# Altium PCB PCB_Testplatine - GND mit Tracks.PcbDoc (part 2 of 4)
Units mm, origin at the board's own origin, x right, y up, seen from the top; angles counter-clockwise.
Board outline 124.77 x 137.35 mm, 2 copper layers (Top Layer, Bottom Layer); 214 components, 181 nets, 1100 pads, 464 vias.
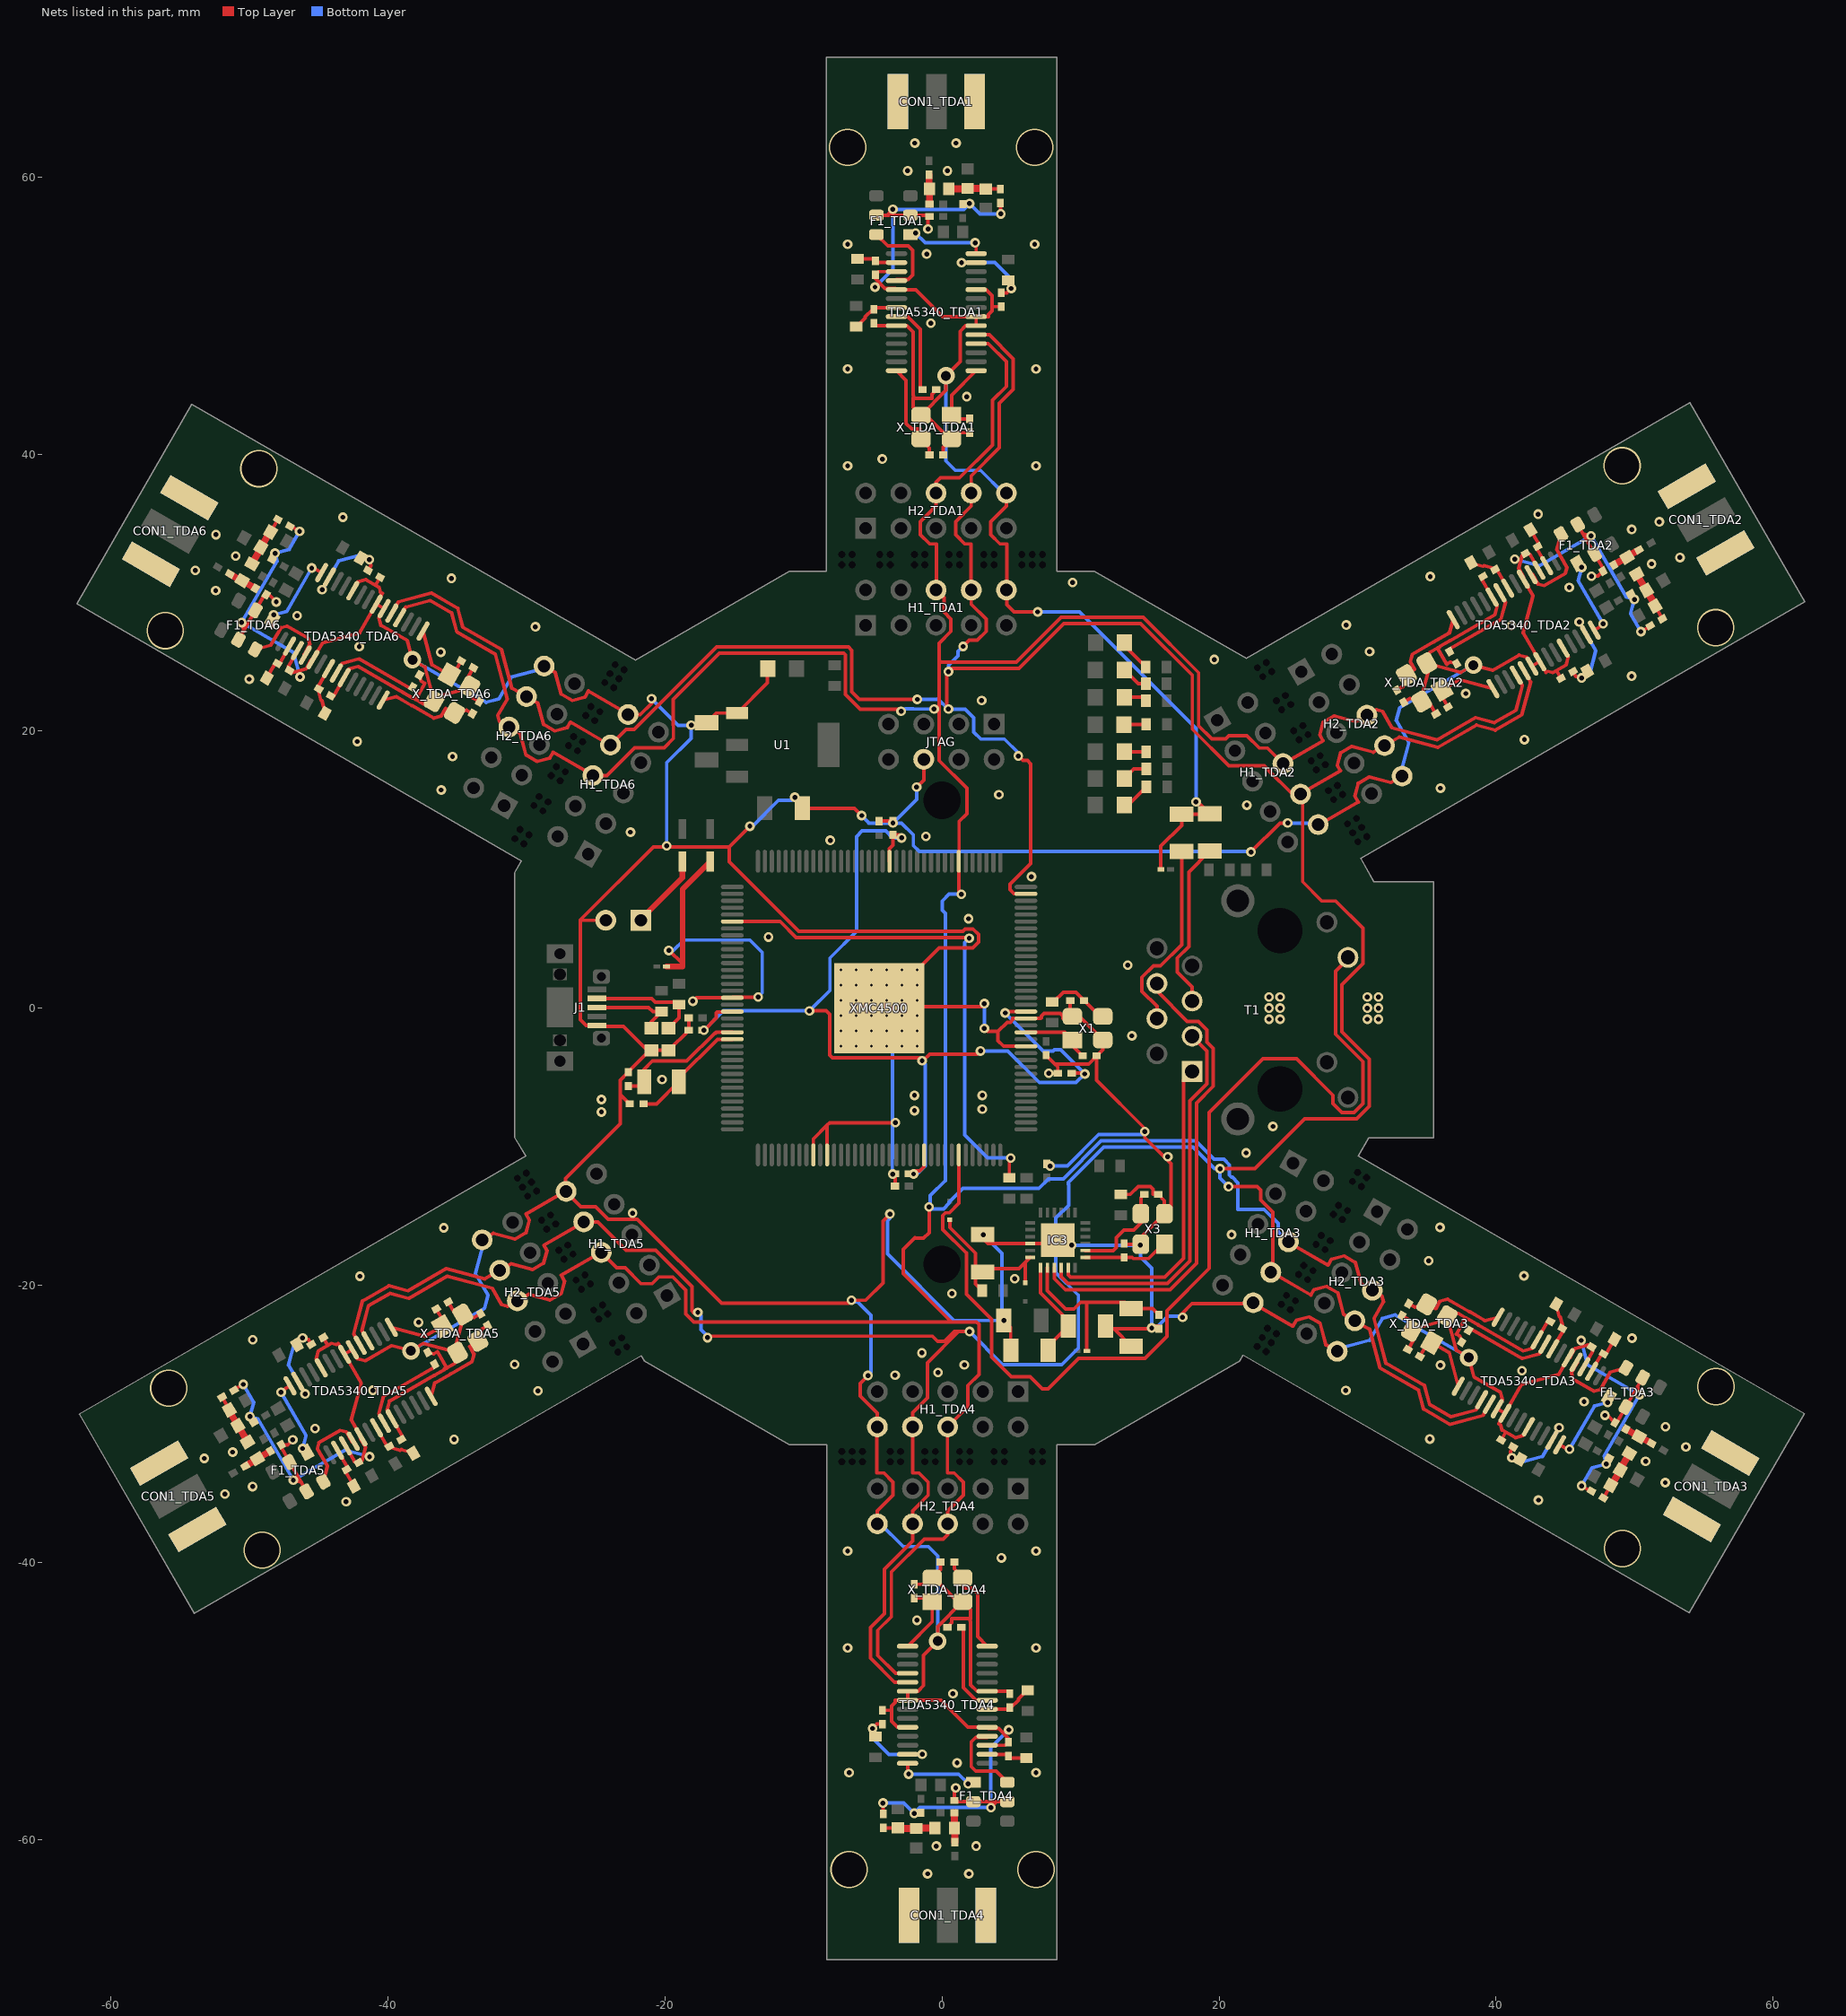
[diagram p2: the nets of this part, all layers, seen from the top]

## Via types
v1: diameter 0.7, hole 0.35, Top Layer to Bottom Layer, 410 vias
v2: diameter 0.5, hole 0.2, Top Layer to Bottom Layer, 36 vias
v3: diameter 2.7, hole 2.5, Top Layer to Bottom Layer, 12 vias
v4: diameter 1.27, hole 0.711, Top Layer to Bottom Layer, 6 vias

## Nets (pads, with @x,y where several pads share a name; then routed paths per layer and width w, separated by ;. In a path a pad name is that pad's centre, name@x,y a point inside that pad or via, vN(x,y) a via of type N, cw(c..) or ccw(c..) an arc to the next point about the centre after c; other vN are vias at no path point) (continued)
GND: C1.1 C2.1 C3.1 C4.1 C5.1 C6.1 C7.1 C8.1 C9.1 C10.1 C11.1 C12.1 C21_TDA1.2 C21_TDA2.2 C21_TDA3.2 C21_TDA4.2 C21_TDA5.2 C21_TDA6.2 C22_TDA1.2 C22_TDA2.2 C22_TDA3.2 C22_TDA4.2 C22_TDA5.2 C22_TDA6.2 C23_TDA1.2 C23_TDA2.2 C23_TDA3.2 C23_TDA4.2 C23_TDA5.2 C23_TDA6.2 C24_TDA1.2 C24_TDA2.2 C24_TDA3.2 C24_TDA4.2 C24_TDA5.2 C24_TDA6.2 C25_TDA1.2 C25_TDA2.2 C25_TDA3.2 C25_TDA4.2 C25_TDA5.2 C25_TDA6.2 C26_TDA1.1 C26_TDA2.1 C26_TDA3.1 C26_TDA4.1 C26_TDA5.1 C26_TDA6.1 C27_TDA1.1 C27_TDA2.1 C27_TDA3.1 C27_TDA4.1 C27_TDA5.1 C27_TDA6.1 C28_TDA1.2 C28_TDA2.2 C28_TDA3.2 C28_TDA4.2 C28_TDA5.2 C28_TDA6.2 C30_TDA1.1 C30_TDA2.1 C30_TDA3.1 C30_TDA4.1 C30_TDA5.1 C30_TDA6.1 C100.1 C101.1 C200.1 C201.1 C202.1 C203.1 C204.1 C205.1 C206.1 C207.1 C208.1 C209.1 C210.1 CON1_TDA1.0 CON1_TDA2.0 CON1_TDA3.0 CON1_TDA4.0 CON1_TDA5.0 CON1_TDA6.0 D2.1 D3.1 F1_TDA1.2 F1_TDA1.5 F1_TDA2.2 F1_TDA2.5 F1_TDA3.2 F1_TDA3.5 F1_TDA4.2 F1_TDA4.5 F1_TDA5.2 F1_TDA5.5 F1_TDA6.2 F1_TDA6.5 H1_TDA1.10 H1_TDA2.10 H1_TDA3.10 H1_TDA4.10 H1_TDA5.10 H1_TDA6.10 H2_TDA1.10 H2_TDA2.10 H2_TDA3.10 H2_TDA4.10 H2_TDA5.10 H2_TDA6.10 H3.2 IC3.22 IC3.EXP J1.5 JTAG.6 L201.1 Power.2 R205.1 TDA5340_TDA1.3 TDA5340_TDA1.5 TDA5340_TDA1.9 TDA5340_TDA1.20 TDA5340_TDA1.21 TDA5340_TDA1.24 TDA5340_TDA2.3 TDA5340_TDA2.5 TDA5340_TDA2.9 TDA5340_TDA2.20 TDA5340_TDA2.21 TDA5340_TDA2.24 TDA5340_TDA3.3 TDA5340_TDA3.5 TDA5340_TDA3.9 TDA5340_TDA3.20 TDA5340_TDA3.21 TDA5340_TDA3.24 TDA5340_TDA4.3 TDA5340_TDA4.5 TDA5340_TDA4.9 TDA5340_TDA4.20 TDA5340_TDA4.21 TDA5340_TDA4.24 TDA5340_TDA5.3 TDA5340_TDA5.5 TDA5340_TDA5.9 TDA5340_TDA5.20 TDA5340_TDA5.21 TDA5340_TDA5.24 TDA5340_TDA6.3 TDA5340_TDA6.5 TDA5340_TDA6.9 TDA5340_TDA6.20 TDA5340_TDA6.21 TDA5340_TDA6.24 U1.1 X1.2 X1.4 X3.2 X3.4 X_TDA_TDA1.2 X_TDA_TDA1.4 X_TDA_TDA2.2 X_TDA_TDA2.4 X_TDA_TDA3.2 X_TDA_TDA3.4 X_TDA_TDA4.2 X_TDA_TDA4.4 X_TDA_TDA5.2 X_TDA_TDA5.4 X_TDA_TDA6.2 X_TDA_TDA6.4 XMC4500.45 XMC4500.47 XMC4500.85 XMC4500.89 XMC4500.145 | length 841.6
  Top Layer w0.254: C30_TDA5.1@-51.115,-27.541 v1(-50.457,-27.161) ; F1_TDA6.5@-50.807,26.592 -50.424,27.255 ; v1(-50.578,27.829) -50.424,27.255 ; C28_TDA6.2@-48.944,29.818 F1_TDA6.2@-49.582,28.714 -50.424,27.255 ; C28_TDA6.2@-48.808,29.855 -48.615,29.855 v1(-48.078,29.318) ; C28_TDA5.2@-47.754,-31.663 F1_TDA5.2@-47.117,-32.767 -46.274,-34.226 ; C28_TDA5.2@-47.718,-31.526 -47.252,-31.526 v1(-46.888,-31.163) ; C30_TDA6.1@-47.055,34.79 v1(-46.397,34.41) ; v1(-46.848,-34.073) -46.274,-34.226 ; TDA5340_TDA6.3@-46.553,25.811 -47.203,24.685 C22_TDA6.2@-47.12,24.377 -46.872,24.234 -45.923,24.489 -45.555,25.126 TDA5340_TDA6.5@-45.427,25.161 -44.727,26.373 -42.063,27.087 TDA5340_TDA6.21@-40.863,29.165 ; F1_TDA5.5@-45.892,-34.889 -46.274,-34.226 ; TDA5340_TDA5.24@-45.205,-25.328 -45.052,-24.755 -44.09,-24.2 -43.74,-24.293 -43.598,-24.212 TDA5340_TDA5.21@-43.148,-24.991 ; C23_TDA5.2@-44.684,-23.782 -44.364,-24.335 ; C21_TDA6.2@-44.139,22.541 -44.03,22.478 -43.963,22.495 TDA5340_TDA6.9@-43.175,23.861 -42.807,24.498 -42.171,24.669 -38.929,22.797 -38.926,22.786 -38.22,22.378 -38.167,22.392 -38.007,22.3 -37.345,23.446 -37.616,23.602 C24_TDA6.2@-37.732,24.038 ; TDA5340_TDA5.3@-43.088,-31.596 -42.438,-32.721 C22_TDA5.2@-42.13,-32.804 -41.882,-32.661 -41.628,-31.712 -41.996,-31.074 -41.962,-30.946 -42.662,-29.733 -41.948,-27.069 TDA5340_TDA5.21@-43.148,-24.991 ; TDA5340_TDA5.20@-42.585,-24.666 TDA5340_TDA5.21@-43.148,-24.991 ; TDA5340_TDA5.20@-42.21,-25.315 -41.656,-25.464 -39.75,-24.364 v4(-38.358,-24.737) -37.449,-24.212 X_TDA_TDA5.2@-34.99,-24.871 ; TDA5340_TDA6.24@-42.184,30.778 -41.61,30.932 -40.649,30.376 -40.555,30.026 -40.413,29.945 TDA5340_TDA6.21@-40.863,29.165 ; -40.903,30.546 C23_TDA6.2@-40.584,31.1 ; TDA5340_TDA6.20@-40.675,28.191 -40.527,27.636 -38.621,26.536 v4(-38.248,25.144) -37.339,24.619 X_TDA_TDA6.2@-36.68,22.16 ; TDA5340_TDA6.20@-40.3,28.84 TDA5340_TDA6.21@-40.863,29.165 ; C21_TDA5.2@-39.049,-31.14 -38.967,-31.093 -38.938,-30.983 TDA5340_TDA5.9@-39.71,-29.646 -40.078,-29.008 -39.908,-28.372 -36.666,-26.5 -36.655,-26.503 -35.949,-26.095 -35.935,-26.042 -35.775,-25.95 -36.436,-24.804 -36.707,-24.96 C24_TDA5.2@-37.142,-24.843 ; -38.049,22.289 -37.463,21.951 X_TDA_TDA6.2@-36.68,22.16 ; -35.786,-25.992 -35.2,-25.654 X_TDA_TDA5.2@-34.99,-24.871 ; C25_TDA5.2@-35.658,-21.215 -35.233,-21.951 X_TDA_TDA5.4@-34.618,-22.116 ; C25_TDA6.2@-33.848,24.566 -34.273,23.83 X_TDA_TDA6.4@-34.108,23.216 ; C26_TDA6.1@-33.412,22.121 -33.888,22.396 X_TDA_TDA6.4@-34.108,23.216 ; C26_TDA5.1@-33.322,-22.06 -33.798,-22.335 X_TDA_TDA5.4@-34.618,-22.116 ; H2_TDA5.10@-33.212,-16.731 -32.397,-16.261 -30.852,-16.675 -30.041,-16.206 -29.798,-15.301 -30.053,-14.861 H1_TDA5.10@-27.204,-13.217 ; H2_TDA6.10@-28.742,24.69 -27.927,24.22 -27.513,22.675 -26.702,22.206 -25.797,22.449 -25.543,22.889 H1_TDA6.10@-22.694,21.245 ; -26.08,6.34 H3.2@-24.29,6.34 ; H1_TDA6.10@-22.68,21.19 -21.799,21.19 -20.98,22.009 v1(-20.98,22.33) ; C12.1@-22.56,-6.91 -23.237,-6.233 ; C5.1@-18.3,-0.7 C4.1@-18.3,-1.6 D2.1@-19.75,-3.05 D3.1@-21,-3.05 D3.1@-21.112,-3.05 ; v1(-18.12,20.42) -17.18,20.42 C101.1@-17,20.6 -16.3,21.3 U1.1@-14.8,21.3 -12.61,23.49 Power.2@-12.61,24.51 ; v1(-13.88,13.13) -15.383,11.627 ; C100.1@-10.1,14.43 -6.34,14.43 v1(-5.81,13.9) ; XMC4500.45@-9.3,-10.6 -9.3,-9.45 -8.3,-8.45 ; XMC4500.47@-8.3,-10.6 -8.3,-8.45 ; v1(-5.36,-26.52) -5.36,-26.56 -5.91,-27.11 -5.91,-28 -4.68,-29.23 H1_TDA4.10@-4.68,-30.23 ; C21_TDA1.2@-4.92,49.44 -4.92,49.33 -4.855,49.265 TDA5340_TDA1.9@-3.295,49.265 -2.559,49.265 -2.093,48.799 -2.093,45.056 -2.101,45.048 -2.101,44.232 -2.062,44.193 -2.062,44.009 -0.739,44.009 -0.739,44.321 C24_TDA1.2@-0.42,44.64 ; F1_TDA1.5@-4.745,57.24 -3.98,57.24 ; H1_TDA4.10@-4.72,-30.27 -4.72,-33.559 -4.212,-33.559 -3.549,-34.222 -3.549,-35.158 -4.68,-36.289 H2_TDA4.10@-4.68,-37.23 ; C8.1@-4.55,13.5 C1.1@-3.55,13.5 v1(-3.55,13.36) ; C23_TDA4.2@-4.31,-50.69 -3.671,-50.69 ; C30_TDA4.1@-4.27,-58.14 v1(-4.27,-57.38) ; v1(-3.773,-14.86) -4.274,-15.361 -4.274,-19.84 -5.524,-21.09 v1(-6.542,-21.09) -6.765,-21.313 -15.93,-21.313 -22.005,-15.238 -24.126,-15.238 -25.034,-14.33 -26.091,-14.33 H1_TDA5.10@-27.204,-13.217 ; v1(-3.57,-11.98) -3.57,-11.95 C3.1@-3.4,-11.95 ; v1(-3.56,57.66) -3.98,57.24 ; C6.1@-3.4,-12.85 C3.1@-3.4,-11.98 ; v1(-3.37,-8.27) -8.12,-8.27 -8.3,-8.45 ; TDA5340_TDA1.3@-3.295,53.165 -4.595,53.165 C22_TDA1.2@-4.82,52.94 -4.82,52.654 -4.125,51.959 -3.389,51.959 TDA5340_TDA1.5@-3.295,51.865 -1.895,51.865 0.055,49.915 TDA5340_TDA1.21@2.455,49.915 ; TDA5340_TDA4.24@-3.231,-51.915 -3.651,-51.495 -3.651,-50.385 -3.395,-50.129 -3.395,-49.965 TDA5340_TDA4.21@-2.495,-49.965 ; TDA5340_TDA4.20@-2.495,-49.315 TDA5340_TDA4.21@-2.495,-49.965 ; -2.093,44.04 -2.093,43.363 X_TDA_TDA1.2@-1.52,42.79 ; C25_TDA4.2@-2.02,-41.59 -1.17,-41.59 X_TDA_TDA4.4@-0.72,-41.14 ; v1(-1.84,15.96) -1.33,16.47 JTAG.6@-1.33,17.96 ; TDA5340_TDA4.20@-1.745,-49.315 -1.339,-48.909 -1.339,-46.709 v4(-0.32,-45.69) -0.32,-44.64 X_TDA_TDA4.2@1.48,-42.84 ; v1(-1.02,56.24) -1.02,57.04 C28_TDA1.2@-0.92,57.14 ; C28_TDA1.2@-1.02,57.24 F1_TDA1.2@-2.295,57.24 -3.98,57.24 ; C26_TDA4.1@-0.12,-39.99 -0.12,-40.54 X_TDA_TDA4.4@-0.72,-41.14 ; C26_TDA1.1@0.08,39.94 0.08,40.49 X_TDA_TDA1.4@0.68,41.09 ; C24_TDA4.2@0.38,-44.69 0.699,-44.371 0.699,-44.059 2.022,-44.059 2.022,-44.243 2.061,-44.282 2.061,-45.098 2.053,-45.106 2.053,-48.849 2.519,-49.315 TDA5340_TDA4.9@3.255,-49.315 4.655,-49.315 4.88,-49.54 C21_TDA4.2@4.88,-49.49 ; C28_TDA4.2@0.88,-57.19 0.88,-56.39 v1(0.98,-56.29) ; C28_TDA4.2@0.98,-57.29 3.94,-57.29 ; TDA5340_TDA1.20@1.705,49.265 1.299,48.859 1.299,46.659 v4(0.28,45.64) 0.28,44.59 X_TDA_TDA1.2@-1.52,42.79 ; C25_TDA1.2@1.98,41.54 1.13,41.54 X_TDA_TDA1.4@0.68,41.09 ; 2.053,-44.09 2.053,-43.413 X_TDA_TDA4.2@1.48,-42.84 ; TDA5340_TDA1.20@2.455,49.265 TDA5340_TDA1.21@2.455,49.915 ; C210.1@2.93,-16.63 3.3,-17 8.1,-17 IC3.EXP@8.35,-16.75 ; v1(3.05,-1.46) 3.279,-1.689 4.031,-1.689 ; v1(3.05,0.327) 3.05,0.194 2.96,0.104 -4.446,0.104 v2(-4,0.55) v2(-1.8,2.75) -0.21,4.34 2.207,4.34 2.627,4.76 2.627,5.32 2.23,5.717 1.67,5.717 1.497,5.544 -10.349,5.544 -15.383,10.578 -15.383,11.627 ; TDA5340_TDA1.24@3.191,51.865 3.611,51.445 3.611,50.335 3.355,50.079 3.355,49.915 TDA5340_TDA1.21@2.455,49.915 ; TDA5340_TDA4.3@3.255,-53.215 4.555,-53.215 C22_TDA4.2@4.78,-52.99 4.78,-52.704 4.085,-52.009 3.349,-52.009 TDA5340_TDA4.5@3.255,-51.915 1.855,-51.915 -0.095,-49.965 TDA5340_TDA4.21@-2.495,-49.965 ; v1(3.52,-57.71) 3.94,-57.29 ; 3.631,50.64 C23_TDA1.2@4.27,50.64 ; v1(4.23,57.33) C30_TDA1.1@4.23,58.09 ; v1(4.45,-22.55) 4.95,-23.05 C202.1@4.95,-24.7 ; H2_TDA1.10@4.64,37.18 4.64,36.239 3.509,35.108 3.509,34.172 4.172,33.509 4.68,33.509 4.68,29.123 5.203,28.6 v1(6.9,28.6) ; F1_TDA4.5@4.705,-57.29 3.94,-57.29 ; XMC4500.85@6.05,-2.75 6.027,-2.727 6.027,-2.75 4.428,-2.75 4.031,-2.353 4.031,-1.689 ; C7.1@7.5,-3.4 8.127,-4.027 ; C200.1@7.55,-11.25 7.927,-11.25 7.927,-11.301 7.828,-11.4 v1(7.8,-11.4) ; C2.1@8.35,-4.7 8.35,-4.25 8.127,-4.027 ; X1.4@9.25,-0.75 8.727,-0.75 8.727,-0.565 8.535,-0.373 7.365,-0.373 7.173,-0.565 7.173,-0.694 7.117,-0.75 XMC4500.89@6.05,-0.75 5.107,-0.75 5.107,-0.843 4.923,-1.027 4.693,-1.027 4.031,-1.689 ; C10.1@9.25,0.55 9.25,-0.45 9.75,-0.45 X1.2@11.6,-2.3 11.6,-3 C9.1@11.15,-3.45 C9.1@11.15,-3.462 ; C207.1@11.8,-22.95 12,-23.15 12.4,-23.15 ; R205.1@12.9,-13.45 13.588,-13.45 14.165,-12.873 15.035,-12.873 15.227,-13.065 15.227,-13.45 C206.1@15.6,-13.45 16.05,-13.9 X3.2@16.05,-14.85 ; C205.1@13.2,-17.05 X3.4@14.32,-17.05 ; C208.1@13.65,-24.4 12.4,-23.15 ; X3.4@14.35,-17.05 14.35,-16.55 X3.2@16.05,-14.85 ; v1(15.13,-23.09) 15.27,-22.95 15.65,-22.95 C201.1@15.65,-23.15 12.4,-23.15 ; L201.1@15.79,10.01 15.79,11.69 17.29,13.19 C203.1@17.29,14.01 C204.1@19.21,14.01 ; v1(17.36,-22.32) 17.29,-22.25 17.29,-22.067 18.032,-21.325 22.474,-21.325 25.323,-22.969 25.577,-22.529 26.482,-22.286 27.293,-22.755 27.707,-24.3 H2_TDA3.10@28.522,-24.77 ; v1(18.33,14.89) 18.46,14.89 C204.1@19.32,14.03 ; v1(22.294,11.27) 24.384,13.36 v1(24.95,13.36) ; H1_TDA2.10@27.205,13.235 30.053,14.88 29.799,15.32 30.041,16.225 30.853,16.694 32.398,16.28 H2_TDA2.10@33.212,16.75 ; C26_TDA3.1@33.192,-22.201 33.668,-22.476 X_TDA_TDA3.4@33.888,-23.296 ; C26_TDA2.1@33.322,22.079 33.799,22.354 X_TDA_TDA2.4@34.618,22.134 ; C25_TDA3.2@33.628,-24.646 34.053,-23.91 X_TDA_TDA3.4@33.888,-23.296 ; C25_TDA2.2@35.658,21.234 35.233,21.97 X_TDA_TDA2.4@34.618,22.134 ; 35.787,26.011 35.2,25.672 X_TDA_TDA2.2@34.991,24.89 ; C24_TDA2.2@37.143,24.862 36.707,24.979 36.437,24.823 35.775,25.969 35.935,26.061 35.949,26.114 36.655,26.522 36.666,26.519 39.908,28.391 40.079,29.027 TDA5340_TDA2.9@39.711,29.664 38.895,31.077 38.893,31.069 C21_TDA2.2@39.05,31.159 ; C24_TDA3.2@37.512,-24.118 37.396,-23.682 37.125,-23.526 37.787,-22.38 37.947,-22.472 38,-22.458 38.706,-22.866 38.709,-22.877 41.951,-24.749 42.587,-24.578 TDA5340_TDA3.9@42.955,-23.941 43.718,-22.62 43.854,-22.583 C21_TDA3.2@43.919,-22.621 ; 37.829,-22.369 37.243,-22.031 X_TDA_TDA3.2@36.46,-22.24 ; TDA5340_TDA3.20@40.08,-28.92 TDA5340_TDA3.21@40.643,-29.245 ; C23_TDA3.2@40.364,-31.18 40.683,-30.626 ; TDA5340_TDA3.20@40.455,-28.271 40.307,-27.716 38.401,-26.616 v4(38.028,-25.224) 37.119,-24.699 X_TDA_TDA3.2@36.46,-22.24 ; TDA5340_TDA3.24@41.964,-30.858 41.39,-31.012 40.429,-30.456 40.335,-30.106 40.193,-30.025 TDA5340_TDA3.21@40.643,-29.245 ; TDA5340_TDA2.20@42.211,25.334 41.656,25.483 39.751,24.383 v4(38.359,24.756) 37.449,24.231 X_TDA_TDA2.2@34.991,24.89 ; TDA5340_TDA2.20@42.586,24.685 TDA5340_TDA2.21@43.149,25.01 ; TDA5340_TDA2.3@43.088,31.614 42.438,32.74 C22_TDA2.2@42.131,32.823 41.883,32.679 41.629,31.73 41.997,31.093 TDA5340_TDA2.5@41.962,30.964 42.662,29.752 41.949,27.088 TDA5340_TDA2.21@43.149,25.01 ; 44.364,24.354 C23_TDA2.2@44.684,23.8 ; TDA5340_TDA2.24@45.205,25.347 45.052,24.774 44.09,24.218 43.74,24.312 43.598,24.23 TDA5340_TDA2.21@43.149,25.01 ; F1_TDA2.5@45.892,34.908 46.275,34.245 ; v1(46.177,-34.49) C30_TDA3.1@46.835,-34.87 ; TDA5340_TDA3.3@46.333,-25.891 46.983,-24.765 C22_TDA3.2@46.9,-24.457 46.652,-24.314 45.703,-24.569 45.335,-25.206 TDA5340_TDA3.5@45.207,-25.241 44.507,-26.453 41.843,-27.167 TDA5340_TDA3.21@40.643,-29.245 ; v1(46.848,34.091) 46.275,34.245 ; v1(46.889,31.182) 47.355,31.182 C28_TDA2.2@47.718,31.545 ; C28_TDA2.2@47.755,31.682 F1_TDA2.2@47.117,32.786 46.275,34.245 ; v1(47.858,-29.398) 48.051,-29.398 C28_TDA3.2@48.588,-29.935 ; C28_TDA3.2@48.724,-29.898 F1_TDA3.2@49.362,-28.794 50.204,-27.335 ; v1(50.358,-27.909) 50.204,-27.335 ; v1(50.458,27.18) C30_TDA2.1@51.116,27.56 ; F1_TDA3.5@50.587,-26.672 50.204,-27.335 ; X_TDA_TDA6.2@-36.68,22.16 -36.5,22.473 -34.177,23.095 X_TDA_TDA6.4@-34.108,23.216 ; X_TDA_TDA5.2@-34.99,-24.871 -35.171,-24.558 -34.549,-22.236 X_TDA_TDA5.4@-34.618,-22.116 ; H1_TDA5.10@-27.204,-13.217 -27.204,-12.304 -23.237,-8.337 -23.237,-6.233 ; -23.237,-6.233 -23.237,-5.195 -22.672,-4.63 C11.1@-22.66,-4.63 -22.66,-4.598 D3.1@-21.112,-3.05 ; D3.1@-21.112,-3.05 -21.29,-3.05 -23.017,-1.323 -24.852,-1.323 J1.5@-24.925,-1.25 -25.69,-1.25 -26.11,-0.83 -26.11,6.37 -20.853,11.627 -15.383,11.627 ; X_TDA_TDA1.2@-1.52,42.79 -1.159,42.79 0.541,41.09 X_TDA_TDA1.4@0.68,41.09 ; X_TDA_TDA4.4@-0.72,-41.14 -0.581,-41.14 1.119,-42.84 X_TDA_TDA4.2@1.48,-42.84 ; 8.127,-4.027 10.585,-4.027 C9.1@11.15,-3.462 ; C9.1@11.15,-3.462 11.15,-5.21 14.63,-8.69 v1(14.63,-8.91) 14.63,-9.349 16.523,-11.242 16.523,-14.377 X3.2@16.05,-14.85 ; X_TDA_TDA3.4@33.888,-23.296 33.957,-23.175 36.28,-22.553 X_TDA_TDA3.2@36.46,-22.24 ; X_TDA_TDA2.4@34.618,22.134 34.549,22.255 35.171,24.577 X_TDA_TDA2.2@34.991,24.89
  Bottom Layer w0.254: v1(-50.457,-27.161) -49.707,-28.46 v1(-49.982,-29.485) -49.408,-29.639 v1(-46.848,-34.073) -43.107,-31.913 v1(-41.345,-32.385) ; v1(-46.397,34.41) -47.147,33.111 v1(-48.172,32.836) -48.018,32.263 v1(-50.578,27.829) -46.837,25.669 v1(-46.365,23.906) ; v4(-38.358,-24.737) -33.038,-21.665 -32.79,-20.74 -33.701,-19.162 H2_TDA5.10@-33.101,-16.924 ; v4(-38.248,25.144) -32.928,22.072 -32.003,22.32 -31.092,23.898 H2_TDA6.10@-28.853,24.498 ; v1(-20.98,22.33) -19.07,20.42 v1(-18.12,20.42) -18.12,19.48 -19.89,17.71 v1(-19.89,11.71) ; v1(-13.88,13.13) -13.687,13.13 -11.828,14.989 -10.871,14.989 v1(-10.64,15.22) ; v1(-6.542,-21.09) -6.423,-21.209 -6.109,-21.209 -5.134,-22.184 -5.134,-26.294 v1(-5.36,-26.52) ; v1(-5.81,13.9) -5.29,13.38 -5.29,13.36 v1(-3.55,13.36) ; v1(-4.85,52.05) -3.56,53.34 v1(-3.56,57.66) 1.56,57.66 v1(1.98,58.08) 2.73,57.33 v1(4.23,57.33) ; H2_TDA4.10@-4.458,-37.23 -2.819,-38.869 -0.997,-38.869 -0.32,-39.546 v4(-0.32,-45.69) ; v1(-4.27,-57.38) -2.77,-57.38 v1(-2.02,-58.13) -1.6,-57.71 v1(3.52,-57.71) 3.52,-53.39 v1(4.81,-52.1) ; v2(-4,-2.75) -3.573,-3.177 -3.573,-7.195 -3.586,-7.208 -3.586,-10.834 -3.6,-10.848 -3.6,-11.98 v1(-3.57,-11.98) ; v1(-3.773,-14.86) -3.773,-15.176 -3.947,-15.35 -3.947,-17.739 0.864,-22.55 v1(4.45,-22.55) 4.323,-22.423 4.323,-17.713 v1(2.98,-16.37) ; v1(-1.84,15.96) -1.84,15.07 v1(-3.55,13.36) ; v4(0.28,45.64) 0.28,39.496 0.957,38.819 2.779,38.819 H2_TDA1.10@4.418,37.18 ; v1(3.05,-1.46) v1(3.05,0.327) ; v1(6.9,28.6) 9.91,28.6 18.33,20.18 v1(18.33,14.89) ; v1(7.8,-11.4) 9.031,-11.4 11.295,-9.136 14.57,-9.136 14.63,-9.076 v1(14.63,-8.91) ; v1(9.34,-17.12) v1(14.32,-17.12) 14.32,-17.96 15.13,-18.77 v1(15.13,-23.09) 15.46,-23.09 16.3,-22.25 17.29,-22.25 v1(17.36,-22.32) ; v1@22.254,11.31 -1.65,11.31 -2.08,11.74 -2.08,12.51 -2.93,13.36 v1(-3.55,13.36) ; v1(24.95,13.36) H1_TDA2.10@27.04,13.36 ; H2_TDA3.10@28.633,-24.578 30.872,-23.978 31.783,-22.4 32.708,-22.152 v4(38.028,-25.224) ; H2_TDA2.10@33.101,16.942 33.701,19.181 32.79,20.759 33.038,21.684 v4(38.359,24.756) ; v1(41.345,32.404) 43.107,31.931 v1(46.848,34.091) 49.408,29.657 v1(49.982,29.504) 49.708,28.479 v1(50.458,27.18) ; v1(46.145,-23.986) 46.617,-25.749 v1(50.358,-27.909) 47.798,-32.343 v1(47.952,-32.916) 46.927,-33.191 v1(46.177,-34.49)
  other v1: -1.05,-62.49 1.93,-62.49 -0.42,-60.49 2.45,-60.49 -6.72,-55.19 6.78,-55.19 1.08,-54.49 0.78,-49.49 -6.82,-46.19 6.78,-46.19 -1.82,-44.19 4.28,-39.69 -6.82,-39.19 6.78,-39.19 -43.036,-35.636 43.056,-35.517 -51.783,-35.086 -49.791,-34.536 52.213,-34.256 50.796,-32.711 -53.273,-32.505 -51.226,-32.05 53.703,-31.676 -35.241,-31.136 35.211,-31.103 -45.279,-30.349 52.231,-30.225 46.349,-28.412 -29.179,-27.636 -41.099,-27.59 29.149,-27.603 -3.4,-26.5 -0.3,-26.3 41.869,-26.171 35.979,-25.773 1.6,-25.75 -30.862,-25.721 -1.46,-24.89 -49.786,-23.944 49.806,-23.825 -37.809,-22.688 0.7,-20.6 5.24,-19.53 -42.041,-19.358 42.011,-19.325 35.132,-18.24 20.9,-16.35 -35.979,-15.858 35.949,-15.825 -22.35,-14.8 16.29,-10.73 21.95,-10.45 23.88,-8.54 -24.6,-7.5 -2,-7.4 2.9,-7.3 -24.6,-6.6 -2,-6.3 2.9,-6.3 -20.22,-5.16 7.7,-4.7 13.7,-2 23.6,-0.8 24.4,-0.8 30.7,-0.8 31.5,-0.8 23.6,0 24.4,0 30.7,0 31.5,0 23.6,0.8 24.4,0.8 30.7,0.8 31.5,0.8 13.4,3.1 -12.54,5.13 1.9,6.45 6.45,9.49 -8.08,12.11 -1.17,12.4 -22.5,12.7 22,14.65 4.1,15.4 -36.169,15.745 35.98,15.877 -35.352,18.16 -42.231,19.245 42.042,19.377 2.85,22.21 37.81,22.707 -50.026,23.745 49.786,23.963 19.65,25.16 -36.199,25.693 30.863,25.74 -42.089,26.091 -29.369,27.523 41.1,27.609 29.18,27.655 -46.569,28.332 -52.451,30.145 45.28,30.368 9.42,30.72 -35.431,31.023 35.242,31.155 -53.923,31.596 51.226,32.069 53.273,32.524 -51.016,32.631 -52.433,34.176 49.791,34.555 51.783,35.104 -43.276,35.437 43.036,35.655 -6.82,39.14 6.78,39.14 -4.32,39.64 1.78,44.14 -6.82,46.14 6.78,46.14 -0.82,49.44 -1.12,54.44 -6.82,55.14 6.68,55.14 -2.49,60.44 0.38,60.44 -1.97,62.44 1.01,62.44
  other v2: -7.3,-2.75 -6.2,-2.75 -5.1,-2.75 -2.9,-2.75 -1.8,-2.75 -7.3,-1.65 -6.2,-1.65 -5.1,-1.65 -4,-1.65 -2.9,-1.65 -1.8,-1.65 -7.3,-0.55 -6.2,-0.55 -5.1,-0.55 -4,-0.55 -2.9,-0.55 -1.8,-0.55 -7.3,0.55 -6.2,0.55 -5.1,0.55 -2.9,0.55 -1.8,0.55 -7.3,1.65 -6.2,1.65 -5.1,1.65 -4,1.65 -2.9,1.65 -1.8,1.65 -7.3,2.75 -6.2,2.75 -5.1,2.75 -4,2.75 -2.9,2.75
  other v3: -6.72,-62.19 6.78,-62.19 -49.098,-39.136 49.118,-39.017 -55.848,-27.444 55.868,-27.325 -56.088,27.245 55.848,27.463 -49.338,38.937 49.098,39.155 -6.82,62.14 6.68,62.14
INTRP: R206.2 XMC4500.6 | length 37.5
  Top Layer w0.254: XMC4500.6@-15.15,6.25 -11.697,6.25 -10.537,5.09 1.9,5.09 v1(1.95,5.04) ; R206.2@4.85,-12.25 4.85,-10.92 v1(4.95,-10.82)
  Bottom Layer w0.254: v1(1.95,5.04) 1.641,4.731 1.641,-9.151 3.29,-10.8 4.776,-10.8 4.853,-10.723 v1(4.95,-10.82)
LED1: T1.11 XMC4500.66 | length 75.9
  Top Layer w0.254: XMC4500.66@1.2,-10.6 1.2,-14.091 0.515,-14.776 0.24,-14.776 0.048,-14.968 0.048,-15.982 1.753,-17.687 1.753,-20.643 3.573,-22.463 3.573,-25.185 5.001,-26.613 6.365,-26.613 7.242,-27.49 7.652,-27.49 9.865,-25.277 14.635,-25.277 16.227,-23.685 16.227,-21.846 19.284,-18.789 19.284,-7.548 23.168,-3.664 25.594,-3.664 28.223,-6.293 28.223,-6.896 28.854,-7.527 29.746,-7.527 30.377,-6.896 30.377,-3.86 28.404,-1.887 28.404,2.65 29.3,3.546 T1.11@29.3,3.66
MISO_TDA1: H1_TDA1.8 H1_TDA2.8 H1_TDA3.8 H1_TDA4.8 H1_TDA5.8 H1_TDA6.8 H2_TDA1.8 H2_TDA2.8 H2_TDA3.8 H2_TDA4.8 H2_TDA5.8 H2_TDA6.8 TDA5340_TDA1.19 TDA5340_TDA2.19 TDA5340_TDA3.19 TDA5340_TDA4.19 TDA5340_TDA5.19 TDA5340_TDA6.19 XMC4500.107 | length 356
  Top Layer w0.254: TDA5340_TDA5.19@-42.022,-24.341 -42.493,-23.526 -41.857,-21.151 -39.942,-20.045 -38.576,-20.411 -35.792,-18.804 -33.012,-19.549 H2_TDA5.8@-31.942,-18.931 -31.127,-18.461 -29.582,-18.875 -28.771,-18.406 -28.528,-17.501 -28.753,-17.113 H1_TDA5.8@-25.887,-15.458 ; TDA5340_TDA6.19@-39.737,28.515 -39.267,29.331 -36.892,29.967 -34.977,28.861 -34.611,27.495 -31.827,25.888 -31.082,23.108 H2_TDA6.8@-30.012,22.49 -29.197,22.02 -28.783,20.475 -27.972,20.007 -27.067,20.249 -26.843,20.637 H1_TDA6.8@-23.977,18.983 ; H1_TDA5.8@-25.88,-15.431 -24.863,-15.431 -22.81,-17.483 -20.694,-17.483 -18.064,-20.113 -18.064,-21.86 -17.955,-21.97 v1(-17.64,-21.97) ; H1_TDA6.8@-23.95,18.99 -22.827,20.113 -22.234,20.113 -16.281,26.066 -6.766,26.066 -6.519,25.819 -6.519,22.829 -5.98,22.29 v1(-1.8,22.29) ; v1(-16.94,-23.79) -16.83,-23.68 -0.707,-23.68 -0.33,-24.057 0.17,-24.057 0.877,-23.35 1.19,-23.35 ; TDA5340_TDA4.19@-2.495,-48.665 -3.437,-48.665 -5.175,-46.927 -5.175,-44.715 -4.175,-43.715 -4.175,-40.501 -2.14,-38.466 -2.14,-36.289 -1.009,-35.158 -1.009,-34.222 -1.672,-33.559 -2.12,-33.559 H1_TDA4.8@-2.12,-30.25 ; H1_TDA4.8@-2.14,-30.23 -2.14,-29.213 -1.063,-28.136 -1.063,-25.603 1.19,-23.35 ; v1(0.46,21.59) 0.43,21.59 0.33,21.69 0.33,24.29 v1(0.46,24.29) ; v1@0.692,24.522 5.224,24.522 5.539,24.522 8.789,27.772 14.32,27.772 18.065,24.028 18.065,20.132 20.694,17.502 23.268,17.502 23.533,17.237 23.533,17.203 25.287,15.45 H1_TDA2.8@25.88,15.45 ; v1(1.51,26.11) 1.963,26.563 2.546,26.563 3.177,27.194 3.177,28.086 2.1,29.163 H1_TDA1.8@2.1,30.18 ; v1(1.98,-23.35) 1.19,-23.35 ; H1_TDA1.8@2.08,30.2 2.08,33.509 1.632,33.509 0.969,34.172 0.969,35.108 2.1,36.239 H2_TDA1.8@2.1,37.18 2.1,38.416 4.135,40.451 4.135,43.665 5.135,44.665 5.135,46.877 3.397,48.615 TDA5340_TDA1.19@2.455,48.615 ; v1(5.504,18.201) 5.835,17.87 6.15,17.87 6.384,17.636 6.384,17.126 6.381,17.123 6.381,13.175 6.384,13.172 6.384,10.434 4.898,8.948 4.898,8.552 5.177,8.273 6.05,8.273 XMC4500.107@6.05,8.25 ; v1(20.06,-11.59) 22.58,-11.59 26.189,-7.981 29.934,-7.981 30.831,-7.084 30.831,-3.672 28.858,-1.699 28.858,1.695 30.377,3.214 30.377,5.768 28.414,7.731 27.419,7.731 26.027,9.123 H1_TDA2.8@26.027,15.45 ; v1(20.68,-12.89) 22.74,-12.89 22.993,-13.143 22.993,-13.847 23.877,-14.731 23.877,-18.923 H1_TDA3.8@23.73,-19.07 ; H1_TDA3.8@23.757,-19.063 26.623,-20.717 26.847,-20.329 27.752,-20.087 28.563,-20.555 28.977,-22.1 H2_TDA3.8@29.792,-22.57 30.862,-23.188 31.607,-25.968 34.391,-27.575 34.757,-28.941 36.672,-30.047 39.047,-29.411 TDA5340_TDA3.19@39.517,-28.595 ; H1_TDA2.8@25.887,15.477 25.98,15.531 28.753,17.132 28.529,17.52 28.771,18.425 29.583,18.893 31.128,18.479 H2_TDA2.8@31.942,18.95 33.012,19.568 35.792,18.823 38.576,20.43 39.942,20.064 41.857,21.17 42.493,23.544 TDA5340_TDA2.19@42.023,24.36
  Bottom Layer w0.254: v1(-17.64,-21.97) -17.408,-22.202 -17.408,-23.222 -16.94,-23.69 v1(-16.94,-23.79) ; v1(-1.8,22.29) -0.346,22.29 -0.306,22.33 v1@0.447,21.577 ; v1(0.46,24.29) 0.46,24.74 1.147,25.427 1.147,25.747 v1(1.51,26.11) ; v1@0.605,21.577 1.656,21.577 2.287,20.946 2.287,19.933 2.797,19.423 4.497,19.423 5.504,18.416 v1(5.504,18.201) ; v1(1.98,-23.35) 4.36,-25.73 8.64,-25.73 9.84,-24.53 9.84,-20.732 8.209,-19.1 8.209,-15.161 9.137,-14.233 9.137,-12.73 9.12,-12.713 9.12,-12.595 11.671,-10.044 18.124,-10.044 19.67,-11.59 v1(20.06,-11.59) 20.06,-12.27 v1(20.68,-12.89)
MOSI_TDA1: H1_TDA1.6 H1_TDA2.6 H1_TDA3.6 H1_TDA4.6 H1_TDA5.6 H1_TDA6.6 H2_TDA1.6 H2_TDA2.6 H2_TDA3.6 H2_TDA4.6 H2_TDA5.6 H2_TDA6.6 TDA5340_TDA1.18 TDA5340_TDA2.18 TDA5340_TDA3.18 TDA5340_TDA4.18 TDA5340_TDA5.18 TDA5340_TDA6.18 XMC4500.115 | length 339.8
  Top Layer w0.254: TDA5340_TDA5.18@-41.459,-24.016 -41.896,-23.26 -41.421,-21.486 -39.87,-20.59 -38.504,-20.956 -35.72,-19.349 -32.485,-20.216 -31.796,-21.41 -31.359,-21.527 H2_TDA5.6@-30.672,-21.131 -29.857,-20.66 -28.312,-21.074 -27.501,-20.606 -27.258,-19.701 -27.503,-19.278 H1_TDA5.6@-24.637,-17.623 ; TDA5340_TDA6.18@-39.174,28.19 -38.738,28.946 -36.964,29.422 -35.413,28.527 -35.047,27.161 -32.263,25.553 -31.396,22.318 -32.086,21.124 -31.969,20.687 H2_TDA6.6@-31.282,20.291 -30.467,19.82 -30.053,18.275 -29.242,17.807 -28.337,18.049 -28.093,18.472 H1_TDA6.6@-25.227,16.818 ; H1_TDA6.6@-25.22,16.791 -24.203,16.791 -22.196,18.797 -20.08,18.797 -19.403,19.474 -19.403,20.437 -19.41,20.444 -19.41,22.295 -16.093,25.612 -7.096,25.612 -6.973,25.489 -6.973,22.641 -5.909,21.577 -3.107,21.577 v1(-2.96,21.43) ; H1_TDA5.6@-24.61,-17.631 -23.487,-18.753 -22.894,-18.753 -21.757,-19.89 -20.947,-19.89 -20.465,-19.408 -19.46,-19.408 -18.518,-20.35 -18.518,-22.068 -17.93,-22.656 2.482,-22.656 ; TDA5340_TDA4.18@-2.495,-48.015 -3.368,-48.015 -4.667,-46.716 -4.667,-44.926 -3.667,-43.926 -3.667,-40.711 -1.299,-38.343 0.08,-38.343 0.4,-38.023 0.4,-36.289 1.531,-35.158 1.531,-34.222 0.868,-33.559 0.38,-33.559 0.38,-30.25 1.863,-28.767 1.863,-27.244 2.657,-26.45 2.657,-22.831 2.482,-22.656 ; v1(-0.94,-14.35) -0.94,-16.217 -1.34,-16.617 -1.9,-16.617 -1.955,-16.562 -2.816,-17.423 -2.816,-19.166 0.674,-22.656 2.482,-22.656 ; v1@-0.69,21.65 -0.63,21.59 v1(-0.58,21.59) ; -0.166,25.09 -0.052,24.976 5.036,24.976 5.351,24.976 8.601,28.226 14.509,28.226 18.519,24.216 18.519,20.369 19.46,19.427 20.465,19.427 20.694,19.656 22.01,19.656 22.894,18.772 23.487,18.772 H1_TDA2.6@24.61,17.649 ; v1(1.38,8.22) 1.246,8.22 1.2,8.266 XMC4500.115@1.2,10.6 1.223,10.623 1.223,13.483 1.78,14.04 1.78,15.867 -0.22,17.867 -0.22,26.337 0.637,27.194 0.637,28.086 0.133,28.59 0.133,29.647 -0.42,30.2 -0.42,33.509 -0.908,33.509 -1.571,34.172 -1.571,35.108 -0.44,36.239 H2_TDA1.6@-0.44,37.18 -0.44,37.973 -0.12,38.293 1.259,38.293 3.627,40.661 3.627,43.876 4.627,44.876 4.627,46.666 3.328,47.965 TDA5340_TDA1.18@2.455,47.965 ; H1_TDA2.6@24.637,17.642 27.503,19.297 27.259,19.72 27.501,20.625 28.313,21.093 29.858,20.679 H2_TDA2.6@30.672,21.149 31.359,21.546 31.796,21.429 32.485,20.235 35.721,19.368 38.504,20.975 39.87,20.609 41.421,21.504 41.896,23.279 TDA5340_TDA2.18@41.46,24.035 ; H1_TDA3.6@25.007,-16.898 27.873,-18.552 28.117,-18.129 29.022,-17.887 29.833,-18.355 30.247,-19.9 H2_TDA3.6@31.062,-20.371 31.749,-20.767 31.866,-21.204 31.176,-22.398 32.043,-25.633 34.827,-27.241 35.193,-28.607 36.744,-29.502 38.518,-29.026 TDA5340_TDA3.18@38.954,-28.27
  Bottom Layer w0.254: v1(-2.96,21.43) -2.96,21.32 -2.66,21.62 -2.087,21.62 -2.057,21.59 v1(-0.58,21.59) ; v1(1.38,8.22) 0.493,8.22 0.003,7.73 0.003,7.063 0.226,6.84 0.226,-12.447 -0.857,-13.53 -0.857,-14.267 v1(-0.94,-14.35) -0.803,-14.487 0.1,-14.487 0.497,-14.09 0.497,-14.027 1.502,-13.022 6.99,-13.022 7.679,-12.333 8.74,-12.333 11.483,-9.59 18.313,-9.59 19.636,-10.913 20.34,-10.913 20.737,-11.31 20.737,-12.057 20.893,-12.213 20.96,-12.213 21.357,-12.61 21.357,-14.524 23.246,-14.524 24.271,-15.549 24.271,-16.142 H1_TDA3.6@25,-16.871
NetC1_2: C1.2 C2.2 C3.2 C4.2 XMC4500.19 XMC4500.61 XMC4500.90 XMC4500.125 | length 76.8
  Top Layer w0.254: v1(-17.2,-1.6) -17.188,-1.6 -16.302,-0.714 -16.302,-0.335 -16.24,-0.273 XMC4500.19@-15.173,-0.273 ; v1(-9.58,-0.2) -8.38,-0.2 -8.127,-0.453 -8.127,-3.385 -7.935,-3.577 v1@-1.446,-3.577 ; XMC4500.125@-3.8,10.6 -3.8,11.5 -3.55,11.75 C1.2@-3.55,12.5 -3.14,12.5 v1(-2.93,12.29) ; v1@-2.066,-11.996 v1(-2.066,-11.975) ; v1@-2.066,-11.752 -1.602,-11.752 -1.323,-11.473 XMC4500.61@-1.323,-10.623 ; v1(-1.446,-3.8) -1.388,-3.8 -0.907,-3.319 2.549,-3.319 v1(2.772,-3.096) ; v1(4.55,-0.35) 4.65,-0.25 XMC4500.90@6.05,-0.25 ; C2.2@9.35,-4.7 v1@10.25,-4.7 ; v1(10.3,-4.75) v1@10.3,-4.55
  Bottom Layer w0.254: v1(-17.2,-1.6) -15.8,-0.2 v1(-9.58,-0.2) -8.1,1.28 -8.1,3.62 -6.177,5.543 -6.177,12.39 -5.78,12.787 -4.073,12.787 -3.576,12.29 v1(-2.93,12.29) ; v1(-2.066,-11.975) -1.795,-11.975 -1.223,-11.403 -1.223,-4.023 v1(-1.446,-3.8) v1@-1.28,-3.8 ; v1(2.772,-3.096) 4.742,-3.096 7.023,-5.377 9.673,-5.377 v1(10.3,-4.75) 8.55,-3 8.117,-3 8.01,-3.107 7.307,-3.107 v1(4.55,-0.35)
NetC9_2: C9.2 X1.1 XMC4500.87 | length 5
  Top Layer w0.254: XMC4500.87@6.05,-1.75 8.85,-1.75 X1.1@9.4,-2.3 9.4,-2.7 C9.2@10.15,-3.45
NetC10_2: C10.2 R10.2 X1.3 | length 4.5
  Top Layer w0.254: R10.2@7.95,0.45 8.05,0.45 8.75,1.15 9.662,1.15 X1.3@11.412,-0.6
NetC11_2: C11.2 X2.1 XMC4500.22 | length 8.7
  Top Layer w0.254: C11.2@-22.66,-5.63 -21.83,-5.63 X2.1@-21.52,-5.32 ; X2.1@-21.52,-4.42 -20.927,-3.827 -18.436,-3.827 -16.405,-1.796 -16.346,-1.796 -16.3,-1.75 XMC4500.22@-15.15,-1.75
NetC12_2: C12.2 X2.2 XMC4500.23 | length 8.5
  Top Layer w0.254: C12.2@-21.56,-6.91 -20.61,-6.91 X2.2@-19.02,-5.32 -19.02,-5.053 -16.217,-2.25 XMC4500.23@-15.15,-2.25
NetC21_TDA1_1: C21_TDA1.1 R1_TDA1.1 TDA5340_TDA1.7 | length 3.5
  Top Layer w0.254: R1_TDA1.1@-6.22,49.19 -6.17,49.19 -5.551,49.809 -5.551,49.898 -5.009,50.44 C21_TDA1.1@-4.92,50.44 -4.795,50.565 TDA5340_TDA1.7@-3.295,50.565
NetC21_TDA2_1: C21_TDA2.1 R1_TDA2.1 TDA5340_TDA2.7 | length 3.5
  Top Layer w0.254: R1_TDA2.1@38.183,32.16 38.208,32.117 39.054,31.89 39.131,31.935 39.871,31.736 C21_TDA2.1@39.916,31.659 40.086,31.613 TDA5340_TDA2.7@40.836,30.314
NetC21_TDA3_1: C21_TDA3.1 R1_TDA3.1 TDA5340_TDA3.7 | length 3.5
  Top Layer w0.254: TDA5340_TDA3.7@44.081,-24.591 44.831,-23.292 C21_TDA3.1@44.785,-23.121 44.83,-23.044 44.631,-22.303 44.554,-22.259 44.328,-21.413 R1_TDA3.1@44.353,-21.37
NetC21_TDA4_1: C21_TDA4.1 R1_TDA4.1 TDA5340_TDA4.7 | length 3.5
  Top Layer w0.254: TDA5340_TDA4.7@3.255,-50.615 4.755,-50.615 C21_TDA4.1@4.88,-50.49 4.969,-50.49 5.511,-49.948 5.511,-49.859 6.13,-49.24 R1_TDA4.1@6.18,-49.24
NetC21_TDA5_1: C21_TDA5.1 R1_TDA5.1 TDA5340_TDA5.7 | length 3.5
  Top Layer w0.254: TDA5340_TDA5.7@-40.836,-30.296 -40.086,-31.595 C21_TDA5.1@-39.915,-31.64 -39.871,-31.717 -39.13,-31.916 -39.053,-31.871 -38.208,-32.098 R1_TDA5.1@-38.183,-32.141
NetC21_TDA6_1: C21_TDA6.1 R1_TDA6.1 TDA5340_TDA6.7 | length 3.5
  Top Layer w0.254: R1_TDA6.1@-44.573,21.29 -44.548,21.333 -44.774,22.179 -44.851,22.223 -45.05,22.964 C21_TDA6.1@-45.005,23.041 -45.051,23.212 TDA5340_TDA6.7@-44.301,24.511
NetC22_TDA1_1: C22_TDA1.1 R2_TDA1.1 TDA5340_TDA1.2 | length 2.8
  Top Layer w0.254: R2_TDA1.1@-6.12,54.09 -4.97,54.09 C22_TDA1.1@-4.82,53.94 ; C22_TDA1.1@-4.695,53.815 TDA5340_TDA1.2@-3.295,53.815
NetC22_TDA2_1: C22_TDA2.1 R2_TDA2.1 TDA5340_TDA2.2 | length 2.8
  Top Layer w0.254: R2_TDA2.1@42.477,34.523 43.052,33.528 C22_TDA2.1@42.997,33.323 ; C22_TDA2.1@42.951,33.152 TDA5340_TDA2.2@43.651,31.939
NetC22_TDA3_1: C22_TDA3.1 R2_TDA3.1 TDA5340_TDA3.2 | length 2.8
  Top Layer w0.254: TDA5340_TDA3.2@46.896,-26.216 C22_TDA3.1@47.596,-25.003 ; C22_TDA3.1@47.766,-24.957 47.971,-24.902 R2_TDA3.1@48.546,-23.907
NetC22_TDA4_1: C22_TDA4.1 R2_TDA4.1 TDA5340_TDA4.2 | length 2.8
  Top Layer w0.254: TDA5340_TDA4.2@3.255,-53.865 C22_TDA4.1@4.655,-53.865 ; C22_TDA4.1@4.78,-53.99 4.93,-54.14 R2_TDA4.1@6.08,-54.14
NetC22_TDA5_1: C22_TDA5.1 R2_TDA5.1 TDA5340_TDA5.2 | length 2.8
  Top Layer w0.254: TDA5340_TDA5.2@-43.651,-31.921 C22_TDA5.1@-42.951,-33.133 ; C22_TDA5.1@-42.996,-33.304 -43.051,-33.509 R2_TDA5.1@-42.476,-34.505
NetC22_TDA6_1: C22_TDA6.1 R2_TDA6.1 TDA5340_TDA6.2 | length 2.8
  Top Layer w0.254: R2_TDA6.1@-48.766,23.827 -48.191,24.822 C22_TDA6.1@-47.986,24.877 ; C22_TDA6.1@-47.816,24.923 TDA5340_TDA6.2@-47.116,26.136
NetC23_TDA1_1: C23_TDA1.1 R3_TDA1.1 TDA5340_TDA1.27 | length 6
  Top Layer w0.254: C23_TDA1.1@4.27,51.64 4.68,51.64 v1(4.99,51.95) R3_TDA1.1@4.99,52.32
  Bottom Layer w0.254: v1(1.403,53.815) 3.805,53.815 4.99,52.63 v1(4.99,51.95)
NetC23_TDA2_1: C23_TDA2.1 R3_TDA2.1 TDA5340_TDA2.27 | length 6
  Top Layer w0.254: C23_TDA2.1@45.55,24.3 45.755,23.945 v1(46.178,23.832) R3_TDA2.1@46.499,24.017
  Bottom Layer w0.254: v1(46,27.871) 47.201,25.791 46.767,24.172 v1(46.178,23.832)
NetC23_TDA3_1: C23_TDA3.1 R3_TDA3.1 TDA5340_TDA3.27 | length 6
  Top Layer w0.254: C23_TDA3.1@41.23,-31.68 41.025,-32.035 v1(41.138,-32.458) R3_TDA3.1@41.458,-32.643
  Bottom Layer w0.254: v1(41.138,-32.458) 41.727,-32.798 43.346,-32.364 v1(44.547,-30.284)
NetC23_TDA4_1: C23_TDA4.1 R3_TDA4.1 TDA5340_TDA4.27 | length 6
  Top Layer w0.254: R3_TDA4.1@-5.03,-52.37 v1(-5.03,-52) -4.72,-51.69 C23_TDA4.1@-4.31,-51.69
  Bottom Layer w0.254: v1(-5.03,-52) -5.03,-52.68 -3.845,-53.865 v1(-1.443,-53.865)
NetC23_TDA5_1: C23_TDA5.1 R3_TDA5.1 TDA5340_TDA5.27 | length 6
  Top Layer w0.254: R3_TDA5.1@-46.498,-23.998 v1(-46.178,-23.813) -45.755,-23.927 C23_TDA5.1@-45.55,-24.282
  Bottom Layer w0.254: v1(-46.178,-23.813) -46.767,-24.153 -47.201,-25.772 v1(-46,-27.852)
NetC23_TDA6_1: C23_TDA6.1 R3_TDA6.1 TDA5340_TDA6.27 | length 6
  Top Layer w0.254: R3_TDA6.1@-41.678,32.563 v1(-41.358,32.378) -41.245,31.955 C23_TDA6.1@-41.45,31.6
  Bottom Layer w0.254: v1(-44.767,30.204) -43.566,32.284 -41.947,32.718 v1(-41.358,32.378)
NetC24_TDA1_1: C24_TDA1.1 TDA5340_TDA1.8 | length 6.5
  Top Layer w0.254: TDA5340_TDA1.8@-3.295,49.915 -2.49,49.915 -1.585,49.01 -1.585,44.805 C24_TDA1.1@-1.42,44.64
NetC24_TDA2_1: C24_TDA2.1 TDA5340_TDA2.8 | length 6.5
  Top Layer w0.254: C24_TDA2.1@36.643,25.728 36.703,25.954 40.345,28.056 40.676,29.292 TDA5340_TDA2.8@40.274,29.989
NetC24_TDA3_1: C24_TDA3.1 TDA5340_TDA3.8 | length 6.5
  Top Layer w0.254: C24_TDA3.1@38.012,-23.252 38.238,-23.191 41.879,-25.294 43.116,-24.963 TDA5340_TDA3.8@43.518,-24.266
NetC24_TDA4_1: C24_TDA4.1 TDA5340_TDA4.8 | length 6.5
  Top Layer w0.254: C24_TDA4.1@1.38,-44.69 1.545,-44.855 1.545,-49.06 2.45,-49.965 TDA5340_TDA4.8@3.255,-49.965
NetC24_TDA5_1: C24_TDA5.1 TDA5340_TDA5.8 | length 6.5
  Top Layer w0.254: TDA5340_TDA5.8@-40.273,-29.971 -40.676,-29.274 -40.344,-28.037 -36.703,-25.935 C24_TDA5.1@-36.642,-25.709
NetC24_TDA6_1: C24_TDA6.1 TDA5340_TDA6.8 | length 6.5
  Top Layer w0.254: TDA5340_TDA6.8@-43.738,24.186 -43.336,24.883 -42.099,25.214 -38.458,23.111 C24_TDA6.1@-38.232,23.172
NetC25_TDA1_1: C25_TDA1.1 TDA5340_TDA1.15 X_TDA_TDA1.1 | length 5.4
  Top Layer w0.254: C25_TDA1.1@1.98,42.54 0.93,42.54 X_TDA_TDA1.1@0.68,42.79 0.68,44.24 TDA5340_TDA1.15@2.455,46.015
NetC25_TDA2_1: C25_TDA2.1 TDA5340_TDA2.15 X_TDA_TDA2.1 | length 5.4
  Top Layer w0.254: C25_TDA2.1@36.524,21.734 35.999,22.643 X_TDA_TDA2.1@36.091,22.984 37.346,23.709 TDA5340_TDA2.15@39.771,23.06
NetC25_TDA3_1: C25_TDA3.1 TDA5340_TDA3.15 X_TDA_TDA3.1 | length 5.4
  Top Layer w0.254: C25_TDA3.1@34.494,-25.146 35.019,-24.237 X_TDA_TDA3.1@35.36,-24.146 36.616,-24.871 TDA5340_TDA3.15@37.266,-27.295
NetC25_TDA4_1: C25_TDA4.1 TDA5340_TDA4.15 X_TDA_TDA4.1 | length 5.4
  Top Layer w0.254: TDA5340_TDA4.15@-2.495,-46.065 -0.72,-44.29 -0.72,-42.84 -0.97,-42.59 C25_TDA4.1@-2.02,-42.59
NetC25_TDA5_1: C25_TDA5.1 TDA5340_TDA5.15 X_TDA_TDA5.1 | length 5.4
  Top Layer w0.254: TDA5340_TDA5.15@-39.771,-23.041 -37.346,-23.691 X_TDA_TDA5.1@-36.09,-22.966 -35.999,-22.624 C25_TDA5.1@-36.524,-21.715
NetC25_TDA6_1: C25_TDA6.1 TDA5340_TDA6.15 X_TDA_TDA6.1 | length 5.4
  Top Layer w0.254: TDA5340_TDA6.15@-37.486,27.215 -36.836,24.791 -35.58,24.066 -35.239,24.157 C25_TDA6.1@-34.714,25.066
NetC26_TDA1_2: C26_TDA1.2 TDA5340_TDA1.14 X_TDA_TDA1.3 | length 7.4
  Top Layer w0.254: TDA5340_TDA1.14@-3.295,46.015 -2.601,45.321 -2.601,45.266 -2.609,45.258 -2.609,44.022 -2.601,44.014 -2.601,42.208 -2.202,41.809 -1.57,41.809 -1.57,41.09 -0.92,40.44 C26_TDA1.2@-0.92,39.94
NetC26_TDA2_2: C26_TDA2.2 TDA5340_TDA2.14 X_TDA_TDA2.3 | length 7.4
  Top Layer w0.254: C26_TDA2.2@32.822,22.945 33.255,23.195 33.493,24.083 34.116,24.443 33.8,24.99 33.946,25.535 35.51,26.438 35.513,26.449 36.584,27.067 36.595,27.064 36.642,27.091 TDA5340_TDA2.14@36.896,28.039
NetC26_TDA3_2: C26_TDA3.2 TDA5340_TDA3.14 X_TDA_TDA3.3 | length 7.4
  Top Layer w0.254: C26_TDA3.2@33.692,-21.335 34.125,-21.585 35.013,-21.347 35.636,-21.706 35.952,-21.159 36.497,-21.013 38.061,-21.916 38.072,-21.913 39.142,-22.531 39.145,-22.542 39.193,-22.57 TDA5340_TDA3.14@40.141,-22.316
NetC26_TDA4_2: C26_TDA4.2 TDA5340_TDA4.14 X_TDA_TDA4.3 | length 7.4
  Top Layer w0.254: C26_TDA4.2@0.88,-39.99 0.88,-40.49 1.53,-41.14 1.53,-41.859 2.162,-41.859 2.561,-42.258 2.561,-44.064 2.569,-44.072 2.569,-45.308 2.561,-45.316 2.561,-45.371 TDA5340_TDA4.14@3.255,-46.065
NetC26_TDA5_2: C26_TDA5.2 TDA5340_TDA5.14 X_TDA_TDA5.3 | length 7.4
  Top Layer w0.254: TDA5340_TDA5.14@-36.896,-28.021 -36.642,-27.073 -36.594,-27.045 -36.583,-27.048 -35.513,-26.43 -35.51,-26.419 -33.946,-25.516 -33.8,-24.971 -34.116,-24.424 -33.493,-24.064 -33.255,-23.176 C26_TDA5.2@-32.822,-22.926
NetC26_TDA6_2: C26_TDA6.2 TDA5340_TDA6.14 X_TDA_TDA6.3 | length 7.4
  Top Layer w0.254: TDA5340_TDA6.14@-40.361,22.236 -39.413,22.49 -39.365,22.462 -39.362,22.451 -38.292,21.833 -38.281,21.836 -36.717,20.933 -36.172,21.079 -35.856,21.626 -35.233,21.267 -34.345,21.505 C26_TDA6.2@-33.912,21.255
NetC29_TDA1_1: C29_TDA1.1 C31_TDA1.1 L4_TDA1.2 | length 2.1
  Top Layer w0.5: L4_TDA1.2@-0.95,59.17 C31_TDA1.1@-0.95,60.16 ; C29_TDA1.1@-0.92,58.04 L4_TDA1.2@-0.92,59.14
NetC29_TDA2_1: C29_TDA2.1 C31_TDA2.1 L4_TDA2.2 | length 2.1
  Top Layer w0.5: C29_TDA2.1@48.497,31.995 L4_TDA2.2@49.45,32.545 ; L4_TDA2.2@49.461,32.586 C31_TDA2.1@50.318,33.081
NetC29_TDA3_1: C29_TDA3.1 C31_TDA3.1 L4_TDA3.2 | length 2.1
  Top Layer w0.5: C29_TDA3.1@49.367,-30.385 L4_TDA3.2@50.32,-30.935 ; L4_TDA3.2@50.361,-30.924 C31_TDA3.1@51.218,-31.419
NetC29_TDA4_1: C29_TDA4.1 C31_TDA4.1 L4_TDA4.2 | length 2.1
  Top Layer w0.5: L4_TDA4.2@0.88,-59.19 C29_TDA4.1@0.88,-58.09 ; C31_TDA4.1@0.91,-60.21 L4_TDA4.2@0.91,-59.22
NetC29_TDA5_1: C29_TDA5.1 C31_TDA5.1 L4_TDA5.2 | length 2.1
  Top Layer w0.5: C31_TDA5.1@-50.318,-33.062 L4_TDA5.2@-49.461,-32.567 ; L4_TDA5.2@-49.45,-32.526 C29_TDA5.1@-48.497,-31.976
NetC29_TDA6_1: C29_TDA6.1 C31_TDA6.1 L4_TDA6.2 | length 2.1
  Top Layer w0.5: C31_TDA6.1@-51.438,31.339 L4_TDA6.2@-50.581,30.844 ; L4_TDA6.2@-50.54,30.855 C29_TDA6.1@-49.587,30.305
NetC30_TDA1_2: C30_TDA1.2 L2_TDA1.1 L3_TDA1.2 L4_TDA1.1 | length 3.7
  Top Layer w0.254: L2_TDA1.1@1.81,59.14 L2_TDA1.1@1.84,59.17 ; L3_TDA1.2@3.15,59.13 C30_TDA1.2@4.19,59.13
  Top Layer w0.5: L4_TDA1.1@0.48,59.14 L2_TDA1.1@1.81,59.14 ; L2_TDA1.1@1.84,59.17 L3_TDA1.2@3.11,59.17
NetC30_TDA2_2: C30_TDA2.2 L2_TDA2.1 L3_TDA2.2 L4_TDA2.1 | length 3.7
  Top Layer w0.254: L2_TDA2.1@50.815,30.181 L2_TDA2.1@50.856,30.17 ; L3_TDA2.2@51.476,29.015 C30_TDA2.2@51.996,28.115
  Top Layer w0.5: L4_TDA2.1@50.15,31.333 L2_TDA2.1@50.815,30.181 ; L2_TDA2.1@50.856,30.17 L3_TDA2.2@51.491,29.07
NetC30_TDA3_2: C30_TDA3.2 L2_TDA3.1 L3_TDA3.2 L4_TDA3.1 | length 3.7
  Top Layer w0.254: C30_TDA3.2@47.756,-35.355 L3_TDA3.2@48.276,-34.455 ; L2_TDA3.1@48.955,-33.299 L2_TDA3.1@48.966,-33.34
  Top Layer w0.5: L3_TDA3.2@48.331,-34.44 L2_TDA3.1@48.966,-33.34 ; L2_TDA3.1@48.955,-33.299 L4_TDA3.1@49.62,-32.147
NetC30_TDA4_2: C30_TDA4.2 L2_TDA4.1 L3_TDA4.2 L4_TDA4.1 | length 3.7
  Top Layer w0.254: C30_TDA4.2@-4.23,-59.18 L3_TDA4.2@-3.19,-59.18 ; L2_TDA4.1@-1.88,-59.22 L2_TDA4.1@-1.85,-59.19
  Top Layer w0.5: L3_TDA4.2@-3.15,-59.22 L2_TDA4.1@-1.88,-59.22 ; L2_TDA4.1@-1.85,-59.19 L4_TDA4.1@-0.52,-59.19
NetC30_TDA5_2: C30_TDA5.2 L2_TDA5.1 L3_TDA5.2 L4_TDA5.1 | length 3.7
  Top Layer w0.254: C30_TDA5.2@-51.996,-28.096 L3_TDA5.2@-51.476,-28.997 ; L2_TDA5.1@-50.856,-30.151 L2_TDA5.1@-50.815,-30.162
  Top Layer w0.5: L3_TDA5.2@-51.491,-29.051 L2_TDA5.1@-50.856,-30.151 ; L2_TDA5.1@-50.815,-30.162 L4_TDA5.1@-50.15,-31.314
NetC30_TDA6_2: C30_TDA6.2 L2_TDA6.1 L3_TDA6.2 L4_TDA6.1 | length 3.7
  Top Layer w0.254: L2_TDA6.1@-49.186,33.26 L2_TDA6.1@-49.175,33.219 ; L3_TDA6.2@-48.496,34.375 C30_TDA6.2@-47.976,35.275
  Top Layer w0.5: L4_TDA6.1@-49.84,32.067 L2_TDA6.1@-49.175,33.219 ; L2_TDA6.1@-49.186,33.26 L3_TDA6.2@-48.551,34.36
NetC201_2: C201.2 C208.2 IC3.2 L200.1 | length 14.1
  Top Layer w0.254: IC3.2@7.6,-18.75 7.6,-20.406 8.92,-21.726 9.517,-21.726 10,-21.243 13.193,-21.243 C208.2@13.65,-21.7 15.2,-21.7 C201.2@15.65,-22.15 ; L200.1@10.45,-24.75 10.45,-21.443
NetC202_2: C202.2 C207.2 IC3.1 | length 6.5
  Top Layer w0.254: IC3.1@7.1,-18.75 7.1,-20.548 C207.2@8.732,-22.18 ; C202.2@7.65,-24.7 7.65,-24.4 C207.2@9.1,-22.95
NetC203_2: C203.2 T1.4 | length 14
  Top Layer w0.254: T1.4@15.51,-0.76 15.51,0.14 14.433,1.217 14.433,2.226 15.257,3.05 15.763,3.05 17.29,4.577 C203.2@17.29,11.31
NetC204_2: C204.2 T1.5 | length 12.2
  Top Layer w0.254: T1.5@18.05,0.51 18.05,1.527 16.973,2.604 16.973,3.618 17.81,4.455 17.81,9.82 C204.2@19.32,11.33
NetC205_2: C205.2 IC3.7 X3.1 | length 6.2
  Top Layer w0.254: IC3.7@10.35,-18 13.713,-18 13.79,-18.077 14.91,-18.077 15.937,-17.05 X3.1@16.05,-17.05
NetC206_2: C206.2 IC3.8 X3.3 | length 7
  Top Layer w0.254: IC3.8@10.35,-17.5 12.35,-17.5 12.573,-17.277 12.573,-16.565 13.115,-16.023 13.827,-16.023 14.35,-15.5 X3.3@14.35,-14.85 C206.2@14.35,-13.7
NetC210_2: C210.2 D200.2 D201.2 IC3.24 R202.1 | length 11.1
  Top Layer w0.254: D200.2@0.55,-15.278 0.55,-15.842 2.4,-17.692 2.4,-19.9 R202.1@2.9,-20.4 ; C210.2@3.18,-18.8 5.55,-18.8 6,-18.35 ; D201.2@6,-19.822 6,-18.35 ; IC3.24@6.35,-18 6,-18.35
NetD1_2: D1.2 L11.1 XMC4500.17 | length 26.9
  Top Layer w0.254: v1(-19.74,4.16) -19.74,4.19 -18.75,3.2 -18.7,3.15 -18.8,3.05 -18.75,3 ; v1(-18,0.5) -17.75,0.75 XMC4500.17@-15.15,0.75 ; XMC4500.17@-15.127,0.773 -13.307,0.773 v1(-13.28,0.8)
  Top Layer w0.4: L11.1@-19.9,3 -18.75,3 -18.75,3.2 -18.75,8.575 D1.2@-16.75,10.575
  Bottom Layer w0.254: v1(-19.74,4.16) -19.412,4.16 -18.657,4.915 -13.878,4.915 -12.99,4.027 -12.99,1.09 v1(-13.28,0.8)
NetD2_2: D2.2 J1.2 R12.2 | length 8.1
  Top Layer w0.254: J1.2@-24.925,0.7 -20.98,0.7 -20.707,0.427 -19.177,0.427 R12.2@-19,0.25 -19,-0.7 D2.2@-19.75,-1.45
NetD3_2: D3.2 J1.3 R13.2 | length 6.3
  Top Layer w0.254: J1.3@-24.925,0.05 -21.19,0.05 -20.89,-0.25 R13.2@-20.25,-0.25 -21,-1 D3.2@-21,-1.45
NetD4_1: D4.1 R20.1 | length 2.4
  Top Layer w0.254: D4.1@13.17,26.38 13.17,26.16 R20.1@14.7,24.63
NetD5_1: D5.1 R21.1 | length 2
  Top Layer w0.254: D5.1@13.16,24.42 14.17,23.41 R21.1@14.71,23.41
NetD6_1: D6.1 R22.1 | length 1.7
  Top Layer w0.254: D6.1@13.15,22.44 14.47,22.44 R22.1@14.72,22.19
NetD7_1: D7.1 R23.1 | length 1.6
  Top Layer w0.254: D7.1@13.14,20.47 14.71,20.47 R23.1@14.73,20.49
NetD8_1: D8.1 R24.1 | length 1.6
  Top Layer w0.254: D8.1@13.15,18.5 14.72,18.5 R24.1@14.73,18.51
NetD9_1: D9.1 R25.1 | length 1.9
  Top Layer w0.254: D9.1@13.16,16.57 13.851,17.26 R25.1@14.75,17.26
NetD10_1: D10.1 R26.1 | length 2.1
  Top Layer w0.254: D10.1@13.16,14.65 13.42,14.65 R26.1@14.75,15.98
NetD11_2: D11.2 H3.1 | length 5.5
  Top Layer w0.4: H3.1@-21.75,6.34 -21.75,6.424 -18.76,9.414 D11.2@-18.76,10.575
NetF1_TDA1_1: F1_TDA1.1@-2.295,55.84 TDA5340_TDA1.28 | length 5.9
  Top Layer w0.254: F1_TDA1.1@-2.295,55.84 -2.395,55.94 v1(-1.92,55.94) ; TDA5340_TDA1.28@2.455,54.465 v1@2.455,55.175
  Bottom Layer w0.254: v1(-1.92,55.94) -1.23,55.25 v1(2.38,55.25)
NetF1_TDA1_6: F1_TDA1.6 TDA5340_TDA1.4 | length 6.2
  Top Layer w0.254: F1_TDA1.6@-4.745,55.84 -3.926,55.021 -2.465,55.021 -2.139,54.695 -2.139,52.935 -2.465,52.609 -3.295,52.609 TDA5340_TDA1.4@-3.295,52.515
NetF1_TDA2_1: F1_TDA2.1@45.905,32.086 TDA5340_TDA2.28 | length 5.9
  Top Layer w0.254: F1_TDA2.1@45.905,32.086 45.941,32.222 v1(46.179,31.811) ; TDA5340_TDA2.28@47.089,27.285 v1@47.704,27.64
  Bottom Layer w0.254: v1(46.179,31.811) 45.926,30.869 v1(47.731,27.742)
NetF1_TDA2_6: F1_TDA2.6 TDA5340_TDA2.4 | length 6.2
  Top Layer w0.254: TDA5340_TDA2.4@42.525,31.289 42.607,31.336 43.022,30.617 43.467,30.498 44.991,31.378 45.111,31.823 44.38,33.089 F1_TDA2.6@44.68,34.208
NetF1_TDA3_1: F1_TDA3.1@48.149,-28.094 TDA5340_TDA3.28 | length 5.9
  Top Layer w0.254: TDA5340_TDA3.28@44.584,-31.52 v1@45.198,-31.875 ; v1(48.048,-28.469) 48.286,-28.058 F1_TDA3.1@48.149,-28.094
  Bottom Layer w0.254: v1(45.301,-31.848) 47.106,-28.721 v1(48.048,-28.469)
NetF1_TDA3_6: F1_TDA3.6 TDA5340_TDA3.4 | length 6.2
  Top Layer w0.254: TDA5340_TDA3.4@45.77,-25.566 45.851,-25.613 45.436,-26.332 45.555,-26.777 47.08,-27.657 47.525,-27.538 48.256,-26.272 F1_TDA3.6@49.374,-25.972
NetF1_TDA4_1: F1_TDA4.1@2.255,-55.89 TDA5340_TDA4.28 | length 5.9
  Top Layer w0.254: v1@-2.495,-55.225 TDA5340_TDA4.28@-2.495,-54.515 ; v1(1.88,-55.99) 2.355,-55.99 F1_TDA4.1@2.255,-55.89
  Bottom Layer w0.254: v1(-2.42,-55.3) 1.19,-55.3 v1(1.88,-55.99)
NetF1_TDA4_6: F1_TDA4.6 TDA5340_TDA4.4 | length 6.2
  Top Layer w0.254: TDA5340_TDA4.4@3.255,-52.565 3.255,-52.659 2.425,-52.659 2.099,-52.985 2.099,-54.745 2.425,-55.071 3.886,-55.071 F1_TDA4.6@4.705,-55.89
NetF1_TDA5_1: F1_TDA5.1@-45.904,-32.067 TDA5340_TDA5.28 | length 5.9
  Top Layer w0.254: v1@-47.703,-27.621 TDA5340_TDA5.28@-47.089,-27.266 ; v1(-46.178,-31.792) -45.941,-32.204 F1_TDA5.1@-45.904,-32.067
  Bottom Layer w0.254: v1(-47.731,-27.723) -45.926,-30.85 v1(-46.178,-31.792)
NetF1_TDA5_6: F1_TDA5.6 TDA5340_TDA5.4 | length 6.2
  Top Layer w0.254: F1_TDA5.6@-44.679,-34.189 -44.38,-33.07 -45.11,-31.805 -44.991,-31.36 -43.466,-30.479 -43.021,-30.599 -42.606,-31.318 TDA5340_TDA5.4@-42.525,-31.271
NetF1_TDA6_1: F1_TDA6.1@-48.369,28.014 TDA5340_TDA6.28 | length 5.9
  Top Layer w0.254: F1_TDA6.1@-48.369,28.014 -48.506,27.978 v1(-48.268,28.389) ; v1@-45.418,31.795 TDA5340_TDA6.28@-44.804,31.44
  Bottom Layer w0.254: v1(-48.268,28.389) -47.326,28.641 v1(-45.521,31.768)
NetF1_TDA6_6: F1_TDA6.6 TDA5340_TDA6.4 | length 6.2
  Top Layer w0.254: F1_TDA6.6@-49.594,25.892 -48.476,26.192 -47.745,27.458 -47.3,27.577 -45.775,26.697 -45.656,26.252 -46.071,25.533 TDA5340_TDA6.4@-45.99,25.486
NetIC3_3: IC3.3 T1.6 | length 35.7
  Top Layer w0.254: IC3.3@8.1,-18.75 8.1,-19.534 8.901,-20.335 16.454,-20.335 18.37,-18.419 18.37,-6.854 19.581,-5.643 19.581,-2.919 19.127,-2.465 19.127,-1.584 18.496,-0.953 17.703,-0.953 15.51,1.24 T1.6@15.51,1.78 T1.6@15.059,1.329
NetIC3_4: IC3.4 T1.3 | length 28.3
  Top Layer w0.254: IC3.4@8.6,-18.75 8.6,-19.392 9.089,-19.881 16.266,-19.881 17.885,-18.262 17.885,-6.697 19.127,-5.455 19.127,-3.107 T1.3@18.05,-2.03
  Bottom Layer w0.254: T1.3@17.855,-2.225 T1.3@18.05,-2.03
NetIC3_5: IC3.5 T1.1 | length 23.5
  Top Layer w0.254: IC3.5@9.1,-18.75 9.1,-19.25 9.277,-19.427 16.077,-19.427 17.431,-18.073 17.431,-5.189 T1.1@18.05,-4.57 T1.1@17.855,-4.375